# Altium PCB backBreakoutPCB.PcbDoc
Units mil, origin at the board's own origin, x right, y up, seen from the top; angles counter-clockwise.
Board outline 2800 x 1650 mil, 2 copper layers (Top Layer, Bottom Layer); 38 components, 35 nets, 176 pads, 5 vias.
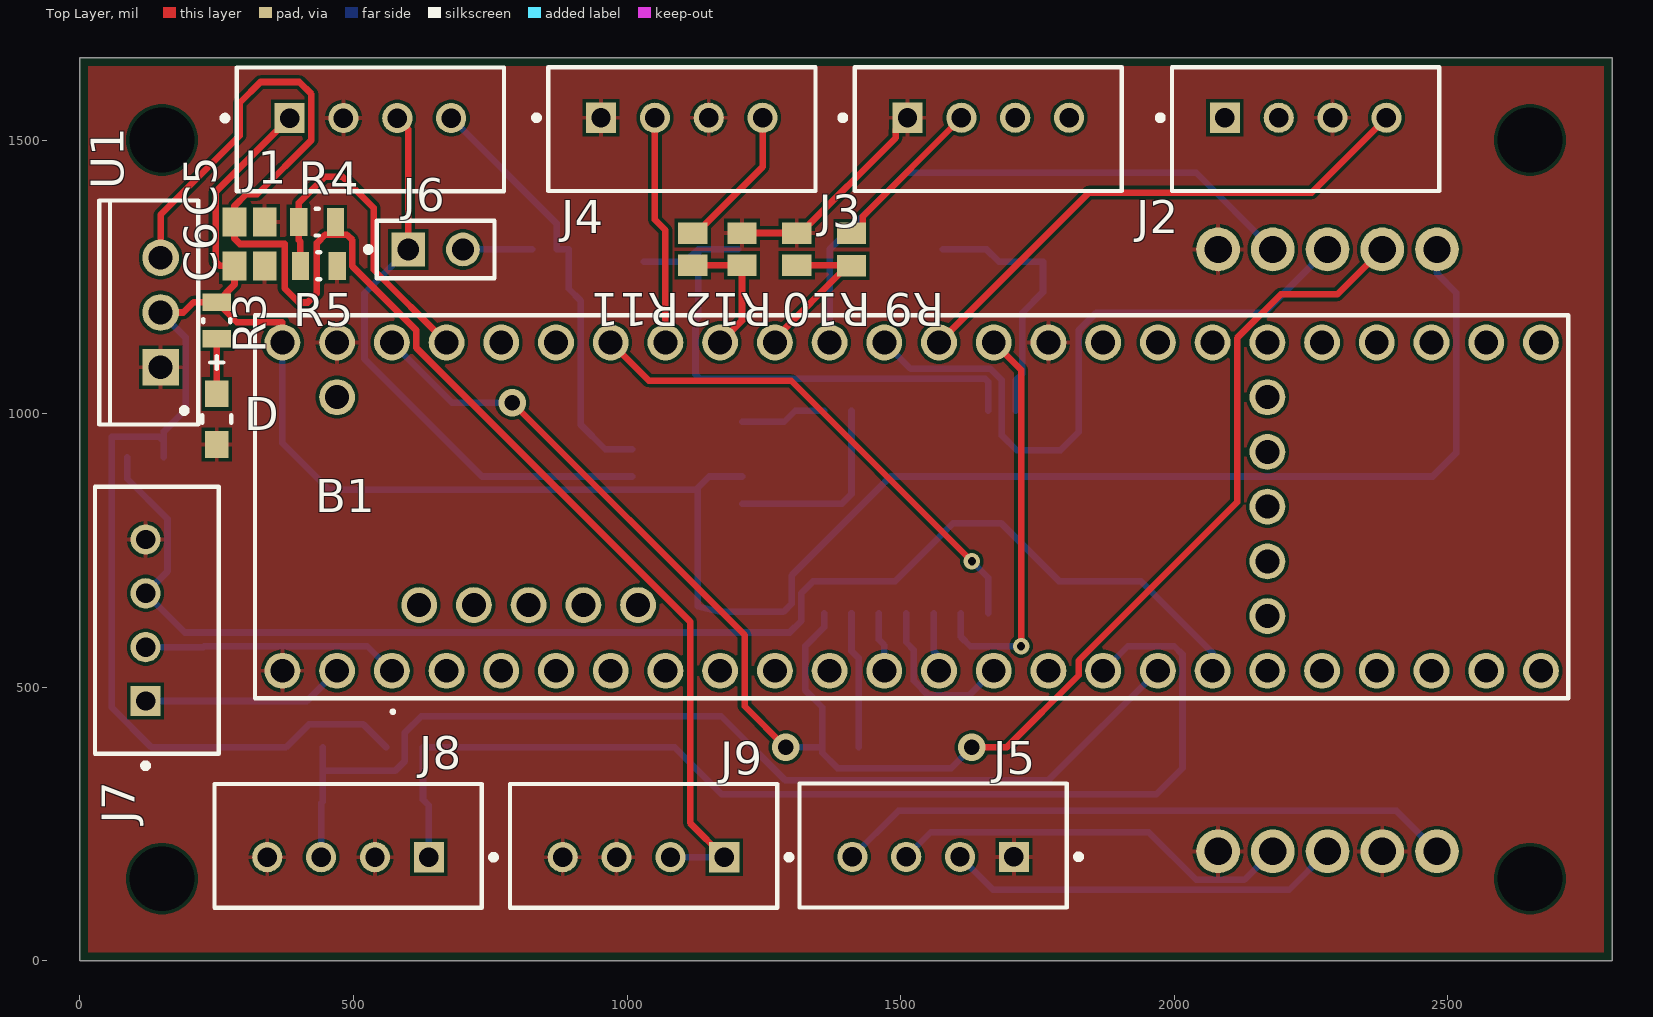
[diagram p0: Top Layer view]
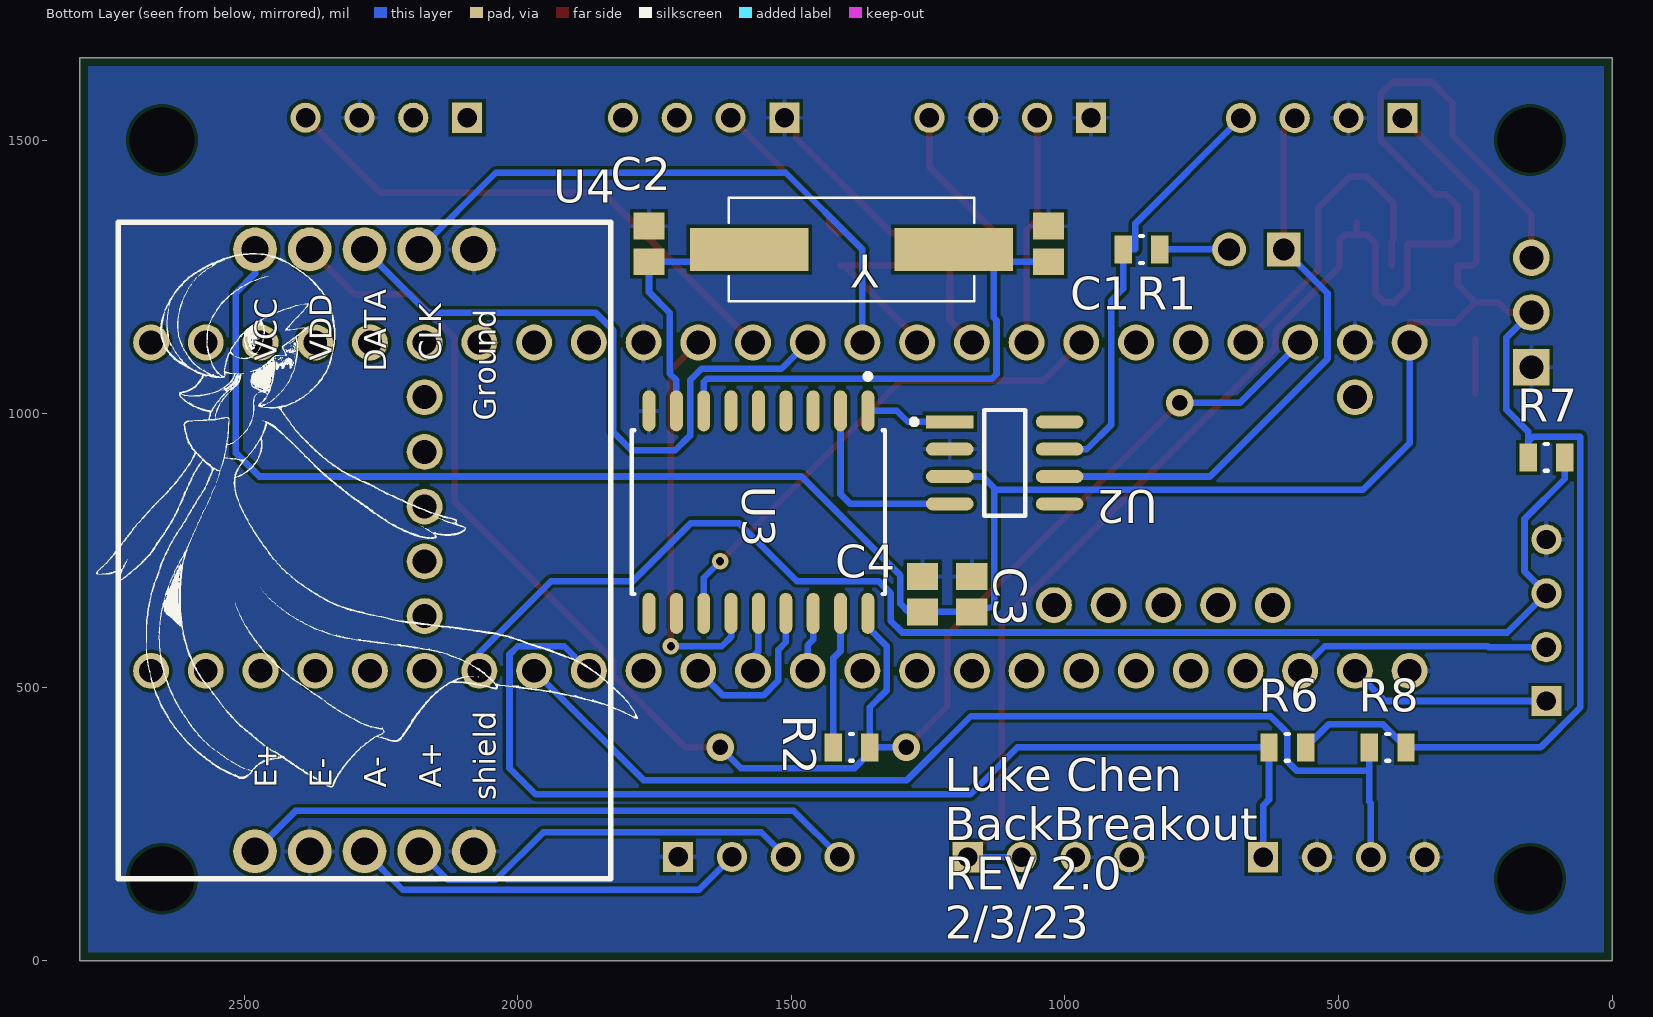
[diagram p1: Bottom Layer view, seen from below]
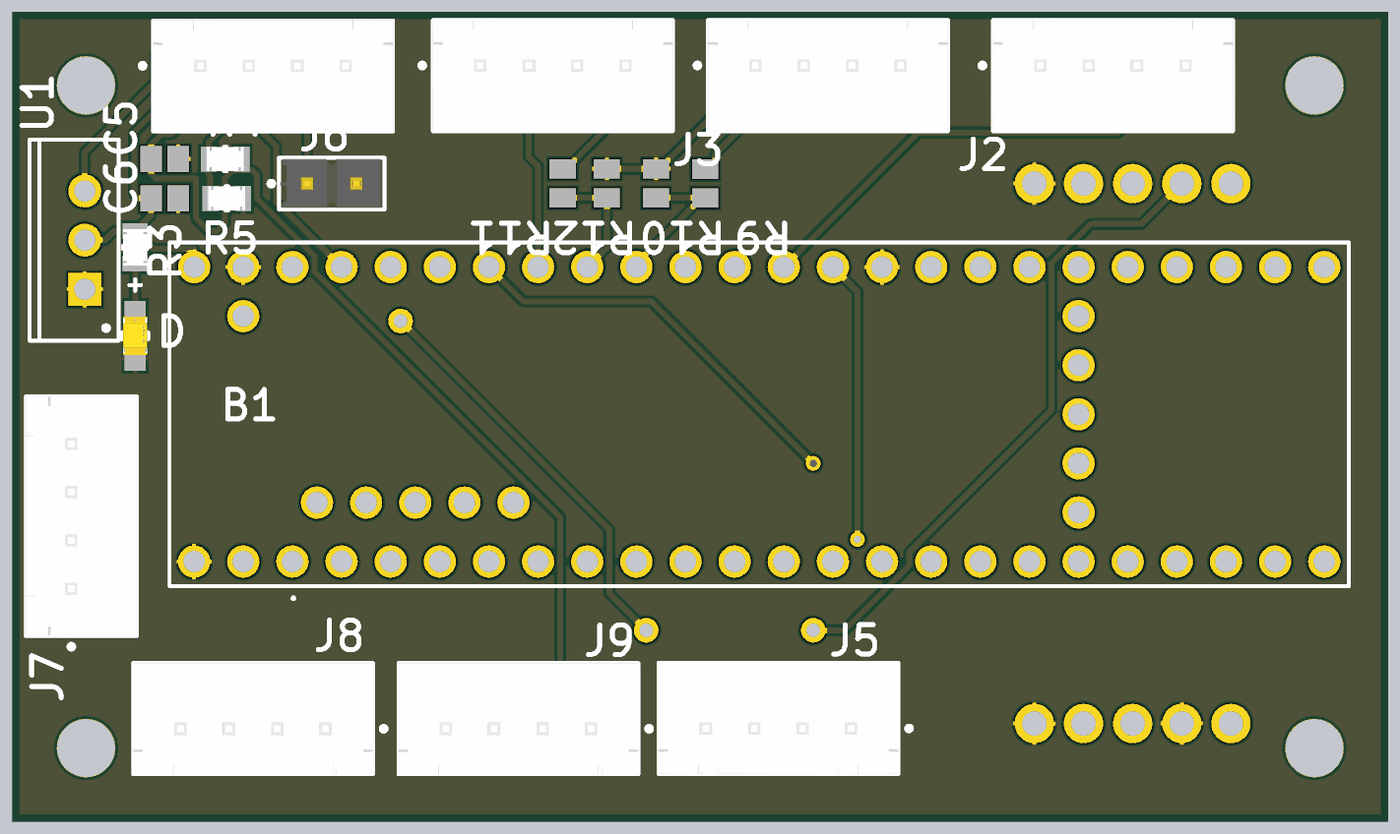
[diagram p2: 3D render of the assembled board from above, using the file's embedded part models]
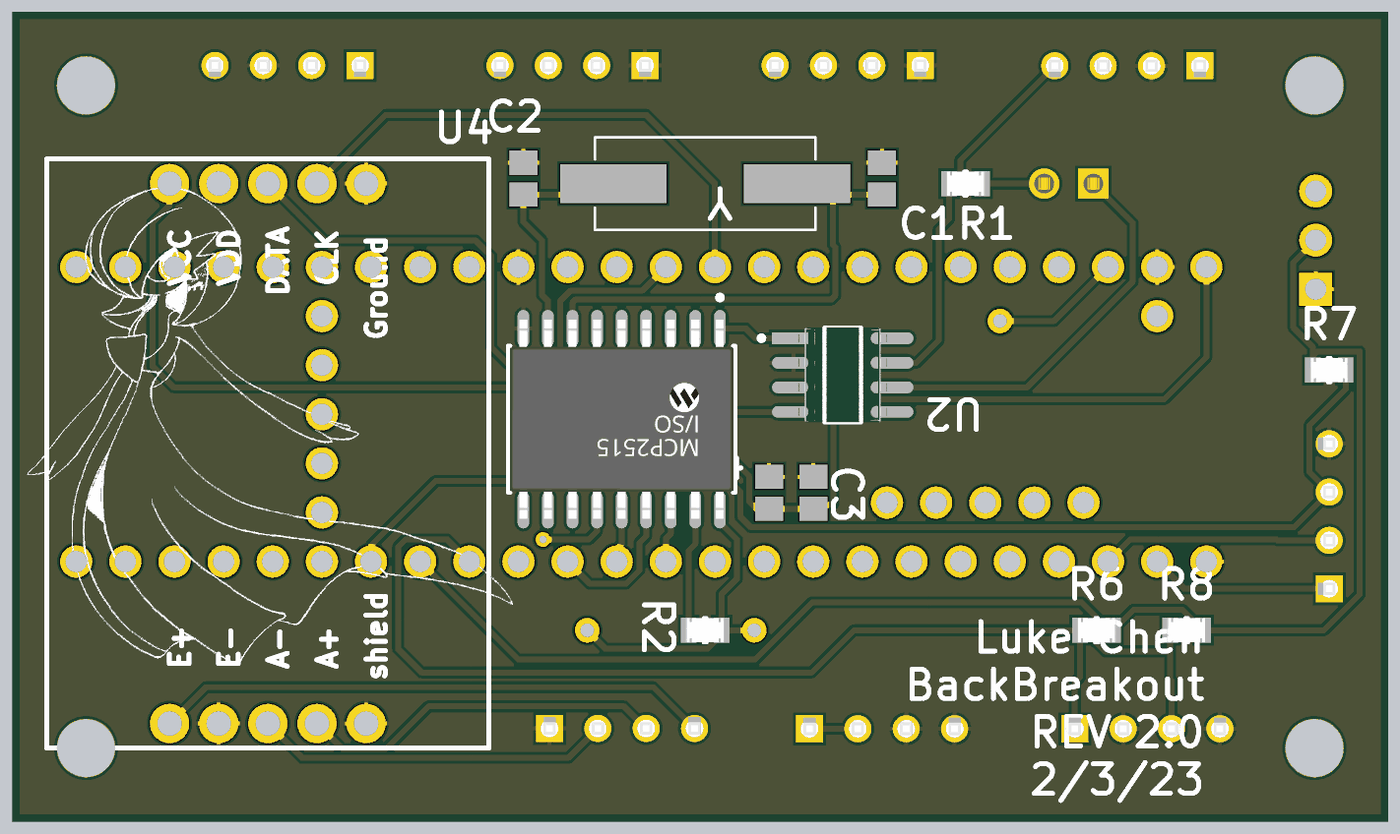
[diagram p3: 3D render of the assembled board from below, using the file's embedded part models]

## Layer stack, top to bottom
Top Solder: solder mask 0.4, Solder Resist, Dk 3.5
Top Layer: signal copper 1.4
Dielectric 1: dielectric 12.6, FR-4, Dk 4.8
Bottom Layer: signal copper 1.4
Bottom Solder: solder mask 0.4, Solder Resist, Dk 3.5

## Board outline
0,0 0,1650 2800,1650 2800,0

## Design rules (kind name [scope] priority, off if disabled: settings)
BoardOutlineClearance [All] p1: gap=15 ignorepadtopadclearanceinfootprint=FALSE
Clearance [All] p1: gap=6 ignorepadtopadclearanceinfootprint=FALSE except(0: Arc-Hole Track-Hole SMDPad-Hole THPad-Hole Via-Hole Fill-Hole Poly-Hole Region-Hole Text-Hole)
ComponentClearance [All] p1: gap=1 collisioncheckmode=3 verticalgap=1 showdistances=FALSE
DiffPairsRouting [All] p1: maxlimit=393.7 minlimit=6 mostfreqgap=8 toplayer_minwidth=6 toplayer_maxwidth=15 toplayer_prefwidth=8 bottomlayer_minwidth=6 bottomlayer_maxwidth=15 bottomlayer_prefwidth=8 maxuncoupledlength=500
HoleSize [All] p1: absolutevalues=TRUE maxlimit=265 minlimit=13 maxpercent=80.000 minpercent=20.000
HoleToHoleClearance [All] p1: gap=10 allowstackedmicrovias=FALSE
MinimumAnnularRing [All] p1: minimumring=7
MinimumSolderMaskSliver [All] p1: minsoldermaskwidth=0
PlaneClearance [All] p1: clearance=10
PlaneConnect [All] p1: planeconnectstyle=Direct reliefexpansion=16 reliefentries=4 reliefconductorwidth=6 reliefairgap=6
PolygonConnect [All] p1: connectstyle=Relief reliefconductorwidth=8 reliefentries=4 polygonreliefangle="90 Angle" airgapwidth=6
RoutingCorners [All] p1: cornerstyle=45-Degree minsetback=49.21 maxsetback=49.21
RoutingVias [All] p1: holewidth=15 width=30 viastyle="Through Hole" minholewidth=13 minwidth=27 maxholewidth=100 maxwidth=114
SilkToSilkClearance [All] p1: silktosilkclearance=0
SilkToSolderMaskClearance [IsPad] p1: minsilkscreentomaskgap=6 clearancetoexposedcopper=TRUE
SolderMaskExpansion [All] p1: expansion=2.95 istentingtop=FALSE
Width Width_3 [InNet('5V')] p1: maxlimit=32 minlimit=10 preferedwidth=16 minimp=50.000000 maximp=50.000000 favimp=50.000000
Width Width_2 [InNet('3.3V')] p2: maxlimit=32 minlimit=10 preferedwidth=16 minimp=50.000000 maximp=50.000000 favimp=50.000000
Width Width_1 [All] p3: maxlimit=32 minlimit=10 preferedwidth=12 minimp=50.000000 maximp=50.000000 favimp=50.000000
Width [InNet('GND')] p4: maxlimit=400 minlimit=8 preferedwidth=16 minimp=50.000000 maximp=50.000000 favimp=50.000000
20 further rules are at their usual default settings.

## Classes and differential pairs
component class amp: R6 R7 R8 U4
component class RearBreakoutSchematic: B1 C5 C6 R4 R5 U1
component class connectors: J1 J2 J3 J4 J5 J7 J8 J9 R9 R10 R11 R12
component class CAN_module: C1 C2 C3 C4 D J6 R1 R2 R3 U2 U3 Y Y?

## Components (designator, comment, footprint, x,y, rotation, side; value= is the part's Value field where it differs from the comment)
B1 "TEENSY_4.1" TEENSY41 570,530 r0 top
C1 "22pf_MCP1" CAPC2013X145X50NL20T20 1030,1310 r90 bottom
C2 "22pf_MCP2" CAPC2013X145X50NL20T20 1760,1310 r90 bottom
C3 "10uf_MCP" CAPC2013X145X50NL20T20 1260,670 r270 bottom
C4 "0.1uf_MCP" CAPC2013X145X50NL20T20 1170,670 r270 bottom
C5 "1uF" CAPC2013X145X50LL20T25 310,1350 r180 top
C6 "1uF" CAPC2013X145X50LL20T25 310,1270 r180 top
D "APT2012MGC" FP-APT2012MGC-MFG 250,990 r270 top
J1 "B4B-XH-A(LF)(SN)" FP-B4B-XH-A_LF_SN-MFG 530.79,1519.33 r180 top
J2 "B4B-XH-A(LF)(SN)" FP-B4B-XH-A_LF_SN-MFG 2240,1520 r180 top
J3 "B4B-XH-A(LF)(SN)" FP-B4B-XH-A_LF_SN-MFG 1660,1520 r180 top
J4 "B4B-XH-A(LF)(SN)" FP-B4B-XH-A_LF_SN-MFG 1100,1520 r180 top
J5 "B4B-XH-A(LF)(SN)" FP-B4B-XH-A_LF_SN-MFG 1559.21,210.67 r0 top
J6 "TSW-102-07-L-S" FP-TSW-102-07-L-S-MFG 650,1300 r0 top
J7 "B4B-XH-A(LF)(SN)" FP-B4B-XH-A_LF_SN-MFG 140.67,622.36 r270 top
J8 "B4B-XH-A(LF)(SN)" FP-B4B-XH-A_LF_SN-MFG 490,210 r0 top
J9 "B4B-XH-A(LF)(SN)" FP-B4B-XH-A_LF_SN-MFG 1030,210 r0 top
R1 "120_MCP" FP-CRCW0805-e3-IPC_C 860,1300 r180 bottom
R2 "10k_MCP1" FP-CRCW0805-e3-IPC_C 1390,390 r180 bottom
R3 "10k_MCP2" FP-CRCW0805-e3-IPC_C 250,1170 r270 top
R4 "27k_BATT_SENS" FP-CRCW0805-e3-IPC_C 433.5,1350 r180 top
R5 "10k_BATT_SENS" FP-CRCW0805-e3-IPC_C 436.5,1270 r180 top
R6 "10k_THERM1_VD1" FP-CRCW0805-e3-IPC_C 593.5,390 r0 bottom
R7 "10k_THERM_SHAFT_VD1" FP-CRCW0805-e3-IPC_C 120,920 r180 bottom
R8 "10k_THERM2_VD1" FP-CRCW0805-e3-IPC_C 410,390 r0 bottom
R9 "10k_RBP_VD1" RESC2013X60X40LL20T25 1410,1300 r90 top
R10 "10k_RBP_VD1" RESC2013X60X40LL20T25 1310,1300.47 r270 top
R11 "10k_RBP_VD1" RESC2013X60X40LL20T25 1120,1300.47 r90 top
R12 "10k_RBP_VD1" RESC2013X60X40LL20T25 1210,1300.47 r270 top
U1 "LD1117V50" TO220 147.43,1184.79 r90 top
U2 "TJA1050T/CM,118" FP-SOT96-1-IPC_A 1110,910 r180 bottom
U3 "MCP2515-I/SO" FP-C04-051-MFG 1560,820 r270 bottom
U4 "hx711" PCBComponent_1 1830,150 r90 bottom
Y "ECS-80-20-5PXDU-TR" XTAL_ECS-80-20-5PXDU-TR 1390,1300 r180 bottom
? "Comment" "Screw M3" 150,150 r0 top
? "Comment" "Screw M3" 2650,150 r0 top
? "Comment" "Screw M3" 150,1500 r0 top
? "Comment" "Screw M3" 2650,1500 r0 top

## Footprints (in the part's own frame and the unit in brackets; to place one, negate y for a bottom-side part, rotate by r counter-clockwise, add the part's x,y. Pads: shape width x height; smd on the part's side, far side on the other; paste and mask are expansions set on the pad)
CAPC2013X145X50LL20T25 [mm] "Chip Capacitor, 2-Leads, Body 2.00x1.25mm, IPC High Density"
  rect 1.1x1.35 smd: 1(-0.7,0) 2(0.7,0)
  body extent -1.1,-0.72 1.1,0.72, height 1.45
CAPC2013X145X50NL20T20 [mm] "Chip Capacitor, 2-Leads, Body 2.00x1.25mm, IPC Medium Density"
  rect 1.25x1.45 smd: 1(-0.825,0) 2(0.825,0)
  body extent -1.1,-0.72 1.1,0.72, height 1.45
FP-APT2012MGC-MFG [mm]
  rect 1.25x1.1 smd paste+0 mask+0: 1(-1.175,0) 2(1.175,0)
  silkscreen extent -2.93,-0.67 0.18,0.67, body extent -1.9,-0.77 1.9,0.77, height 0.25
FP-B4B-XH-A_LF_SN-MFG [mm]
  rect 1.4x1.4 hole 0.9 paste-1000 mask+0: 1(3.75,-0.525)
  round 1.4 hole 0.9 paste-1000 mask+0: 2(1.25,-0.525) 3(-1.25,-0.525) 4(-3.75,-0.525)
  silkscreen extent -6.2,-2.88 6.87,2.87, body extent -6.3,-2.98 6.3,2.98, height 0.25
FP-C04-051-MFG [mm]
  rrect100% 1.9x0.6 smd paste+0 mask+0: 1(-4.7,5.08) 2(-4.7,3.81) 3(-4.7,2.54) 4(-4.7,1.27) 5(-4.7,0) 6(-4.7,-1.27) 7(-4.7,-2.54) 8(-4.7,-3.81) 9(-4.7,-5.08) 10(4.7,-5.08) 11(4.7,-3.81) 12(4.7,-2.54) 13(4.7,-1.27) 14(4.7,0) 15(4.7,1.27) 16(4.7,2.54) 17(4.7,3.81) 18(4.7,5.08)
  silkscreen extent -6.42,-5.88 3.8,5.88, body extent -5.15,-5.77 5.15,5.77, height 2.65
FP-CRCW0805-e3-IPC_C [mil]
  rect 31.75x51.5 smd paste+0 mask+0: 1(-33.5,0) 2(33.5,0)
  silkscreen extent -3,-25 3,25, body extent -39,-25 39,25, height 20
FP-SOT96-1-IPC_A [mil]
  rect 86.79x23.94 smd paste+0 mask+0: 1(-100.43,75)
  rrect100% 86.79x23.94 smd paste+0 mask+0: 2(-100.43,25) 3(-100.43,-25) 4(-100.43,-75) 5(100.43,-75) 6(100.43,-25) 7(100.43,25) 8(100.43,75)
  silkscreen extent -170,-96 37,96, body extent -118,-96 118,96, height 69
FP-TSW-102-07-L-S-MFG [mm]
  rect 1.57x1.57 hole 1.02 paste-1000 mask+0: 1(-1.27,0)
  round 1.57 hole 1.02 paste-1000 mask+0: 2(1.27,0)
  silkscreen extent -3.25,-1.34 2.73,1.34, body extent -2.67,-1.27 2.54,1.27, height 8.71
PCBComponent_1 [mil]
  round 80 hole 50 mask+2.5: 1(50,650) 2(50,550) 3(50,450) 4(50,350) 5(50,250) 6(1150,650) 7(1150,550) 8(1150,450) 9(1150,350) 10(1150,250)
  silkscreen extent 0,0 1200,900
RESC2013X60X40LL20T25 [mm] "Chip Resistor, 2-Leads, Body 2.00x1.25mm, IPC High Density"
  rect 1x1.35 smd: 1(-0.75,0) 2(0.75,0)
  body extent -1.1,-0.72 1.1,0.72, height 0.6
"Screw M3" [mm]
  round 0 hole 3: x(0,0)
TEENSY41 [mm]
  round 1.665 hole 1.11: 1(0,0) 2(2.54,0) 3(5.08,0) 4(7.62,0) 5(10.16,0) 6(12.7,0) 7(15.24,0) 8(17.78,0) 9(20.32,0) 10(22.86,0) 11(25.4,0) 12(27.94,0) 13(27.94,15.24) 14(25.4,15.24) 15(22.86,15.24) 16(20.32,15.24) 17(17.78,15.24) 18(15.24,15.24) 19(12.7,15.24) 20(10.16,15.24) 21(7.62,15.24) 22(5.08,15.24) 23(2.54,15.24) 24(33.02,0) 25(35.56,0) 26(38.1,0) 27(40.64,0) 28(43.18,0) 29(45.72,0) 30(48.26,0) 31(50.8,0) 32(53.34,0) 33(53.34,15.24) 34(50.8,15.24) 35(48.26,15.24) 36(45.72,15.24) 37(43.18,15.24) 38(40.64,15.24) 39(38.1,15.24) 40(35.56,15.24) 41(33.02,15.24) 42(30.48,0) 43(40.64,2.54) 44(40.64,5.08) 45(40.64,7.62) 46(40.64,10.16) 47(40.64,12.7) 48(11.43,3.05) 49(8.89,3.05) 50(6.35,3.05) 51(3.81,3.05) 52(1.27,3.05) 53(0,15.24) 55(-5.08,15.24) 57(-2.54,0) 68(-2.54,12.7) 69(30.48,15.24) 70(-2.54,15.24) 71(-5.08,0)
  silkscreen extent -6.35,-1.95 54.61,16.51
TO220 [mm] "TO, Thru-Hole, Vertical, Heatsink Mounted; 3 In-Line Leads; Pitch 2.54 mm"
  rect 1.7x1.7 hole 1.1: 1(-2.54,0)
  round 1.7 hole 1.1: 2(0,0) 3(2.54,0)
  silkscreen extent -5.2,-1.75 5.2,2.85, body extent -5.25,-1.8 5.25,2.9, height 19.7
XTAL_ECS-80-20-5PXDU-TR [mm]
  rect 5.5x2 smd: 1(-4.75,0) 2(4.75,0)
  silkscreen extent -5.7,-2.4 5.7,2.4

## Part data
B1: "Teensy 4.1 Development Board", Manufacturer_Name=PJRC, Manufacturer_Part_Number="TEENSY 4.1", Datasheet Link=https://www.pjrc.com/store/teensy41.html
C1 C2 C3 C4: library part CMP-1036-01227-2, Manufacturer=Vitramon, Part Number=VJ0805A220GXXCW1BC
C5 C6: library part CMP-1036-04746-2, "C0805C105K4PACTU", Manufacturer=Kemet, Part Number=C0805C105K4PACTU
D: library part CMP-44529-000017-1, "LED GREEN CLEAR CHIP SMD", Case Code (Imperial)=0805, Case Code (Metric)=2012, Color=Green, Forward Current=20mA, Forward Voltage=2.1V, Lens Color=Colorless, Max Operating Temperature=85°C, Min Operating Temperature=-40°C, Package Quantity=2000, Power Rating=75mW, Case/Package=0805, Dominant Wavelength=570nm, Height=0.75mm, Illumination Color=Green, Lead Free="Lead Free", Length=2mm, Lens Style=Clear, Lens Transparency=Clear, Luminous Intensity=70mcd, Mount="Surface Mount", Packaging="Tape and Reel", Test Current=20mA, Viewing Angle=120°, Width=1.25mm
J1 J2 J3 J4 J5 J7 J8 J9: library part CMP-17439-000250-1, "CONN HEADER VERT 4POS 2.5MM", Color=Natural, Contact Resistance=20mR, Current Rating=3A, Flammability Rating="UL94 V-0", Housing Color=White, Insulation Resistance=1GR, Max Operating Temperature=85°C, Max Voltage Rating (AC)=250V, Min Operating Temperature=-25°C, Package Quantity=500, Connector Type=Header, Contact Finish - Mating=TIN, Contact Material=Brass, Contact Plating=Tin, Contact Shape=Square, Contact Type="Male Pin", Depth=5.75mm, Fastening Type=Detent, Gender=Male, Housing Material=Polyamide, Insulation Color=Natural, Insulation Material=Nylon, Lead Free="Lead Free", Lead Pitch=2.5mm, Length=12.4mm, Mated Stacking Heights=9.8mm, Material=Polyamide, Max Current Rating=3A, Max Voltage Rating (DC)=250V, Mount="Through Hole", Number of Contacts=4, Number of Positions=4, Number of Rows=1, Orientation=Straight, Packaging=Bulk, Pitch=2.5mm, REACH SVHC="No SVHC", Series=XH, Termination=Solder, Voltage Rating=250V, Voltage Rating (AC)=250V, Wire/Cable Gauge=22AWG
J6: library part CMP-02766-001428-1, "CONN HEADER VERT 2POS 2.54MM", Color=Black, Current Rating=7.6A, Max Operating Temperature=125°C, Max Voltage Rating (AC)=550V, Min Operating Temperature=-55°C, Package Quantity=1, Connector Type="Male Pin", Contact Material=Bronze, Contact Mating Length=0.23inch, Contact Plating=Gold, Contact Type="Male Pin", Depth=2.54mm, Gender=Male, Housing Color=Black, Housing Material=Polyester, Lead Free="Lead Free", Length=5.08mm, Max Current Rating=7.6A, Mount="Through Hole", Number of Contacts=2, Number of Positions=2, Number of Rows=1, Orientation=Straight, Packaging=Bulk, Pitch=2.54mm, Radiation Hardening=No, REACH SVHC="No SVHC", RoHS Compliant=Yes, Series=TSW, Termination=Solder, Voltage Rating=550V, Width=2.54mm
R1 R2 R3 R4 R5 R6 R7 R8: library part CMP-02407-009256-1, "RES Thick Film, 4.02Ω, 1%, 0.125W, 200ppm/°C, 0805", Case Code (Imperial)=0805, Case Code (Metric)=2012, Max Operating Temperature=155°C, Max Power Dissipation=125mW, Min Operating Temperature=-55°C, Package Quantity=5000, Resistance=4.02R, Temperature Coefficient=200ppm/°C, Tolerance=1%, Voltage Rating=150V, Case/Package=0805, Composition="Thick Film", Contact Plating=Tin, Features="Automotive AEC-Q200", Height=0.02inch, Lead Free="Lead Free", Length=0.079inch, Number of Terminations=2, Packaging="Tape and Reel", Power Rating=125mW, Radiation Hardening=No, Voltage Rating (DC)=150V, Weight=0.000194oz, Width=0.049inch
R9 R10 R11 R12: library part CMP-2001-00877-1, Manufacturer=Panasonic, Part Number=ERA6AEB7870V
U1: library part CMP-0244-00472-1, "Fixed Low Drop Positive Voltage Regulator, 5V, 3-Pin TO-220", ComponentLink1Description="Manufacturer URL", ComponentLink1URL=http://www.st.com, ComponentLink2Description=Datasheet, ComponentLink2URL=http://www.st.com/internet/com/TECHNICAL_RESOURCES/TECHNICAL_LITERATURE/DATASHEET/CD00000544.pdf, ComponentLink3Description="Package Specification", ComponentLink3URL=http://www.st.com/internet/com/TECHNICAL_RESOURCES/TECHNICAL_LITERATURE/PACKAGE_INFORMATION/CD00004649.pdf, DatasheetVersion=1/11/2011, PackageDescription="TO, Thru-Hole, Vertical, Heatsink Mounted; 3 In-Line Leads; Pitch 2.54 mm", PackageReference=TO220, PackageVersion=ver3.0
U2: library part CMP-2000-04923-2, "IC TRANSCEIVER HALF 1/1 8SO", Case/Package=SO, Max Operating Temperature=150°C, Max Supply Current=10mA, Max Supply Voltage=5.25V, Min Operating Temperature=-40°C, Min Supply Voltage=4.75V, Package Quantity=2500, Contact Plating=Gold, Data Rate=1Mbps, Interface=CAN, Lead Free="Lead Free", Mount="Surface Mount", Nominal Supply Current=10mA, Number of Pins=8, Number of Receive Buffers=1, Number of Transceivers=1, Number of Transmit Buffers=1, Packaging="Tape and Reel", Radiation Hardening=No, REACH SVHC="No SVHC", Receiver Hysteresis=70mV, Simplex/Duplex="Half Duplex"
U3: library part CMP-0186-00133-3, "IC CAN CONTROLLER W/SPI 18SOIC", Ambient Temperature Range High=+125°C, Ambient Temperature Range Low=-65°C, Manufacturer=Microchip, Max Supply Voltage=5.5V, Min Supply Voltage=2.7V, Nominal Supply Current=10mA, Package=C04-051, Temperature="-40°C to +85°C", Temperature Range High=+85°C, Temperature Range Low=-40°C, Automotive=No, Category=IC, ComponentLink2Description=Datasheet, ComponentLink2URL=http://ww1.microchip.com/downloads/en/DeviceDoc/MCP2515-Stand-Alone-CAN-Controller-with-SPI-20001801J.pdf, Device Class L1="Integrated Circuits (ICs)", Device Class L2="Interface ICs", Device Class L3=Controllers, Digikey Description="IC CAN CONTROLLER W/SPI 18SOIC", Footprint Url=http://ww1.microchip.com/downloads/en/DeviceDoc/18L_SOIC_Wide_7.50_SO_C04-0051D.pdf, Function=Controller, Height=2.65mm, Interface=SPI,CAN, Ipc Land Pattern Name=SOIC127P1030X265-18, Lead Free=Yes, Manufacturer Part Number=MCP2515-I/SO, Mouser Description="CAN Interface IC W/ SPI Interface", Octopart=https://octopart.com/mcp2515-i%2Fso-microchip-430187, RoHS=TRUE, Standoff Height=0.1mm
U4: library part Component_1
Y: "8MHz Â±30ppm Crystal 20pF 60 Ohms HC-49/US", Package="HC49/US ECS International", Availability=Unavailable, MF="ECS Inc.", MP=ECS-80-20-5PXDU-TR, Price=None, SnapEDA_Link=https://www.snapeda.com/parts/ECS-80-20-5PXDU-TR/ECS%20Inc./view-part/584052/?ref=snap

## Via types
v1: diameter 50, hole 28, Top Layer to Bottom Layer, 3 vias
v2: diameter 30, hole 15, Top Layer to Bottom Layer, 2 vias

## Nets (pads, with @x,y where several pads share a name; then routed paths per layer and width w, separated by ;. In a path a pad name is that pad's centre, name@x,y a point inside that pad or via, vN(x,y) a via of type N, cw(c..) or ccw(c..) an arc to the next point about the centre after c; other vN are vias at no path point)
3.3V: B1.53 R2.2 U3.18 U4.7 | length 3070.3
  Top Layer w12: v1(790,1020) 1214.78,595.22 1214.78,465.22 v1(1290,390) ; v1(1630,390) 1693.32,390 1825.22,521.9 1825.22,548.55 2114.78,838.1 2114.78,1138.1 2194.45,1217.77 2297.77,1217.77 U4.7
  Bottom Layer w12: B1.53 680,1020 v1(790,1020) ; v1(1290,390) R2.2 ; U3.18 1360,609.37 1325.22,574.59 1325.22,494.79 1356.5,463.51 R2.2 ; v1(1630,390) 1592.25,352.25 1384.38,352.25 1356.5,380.12 R2.2
+5: B1.55 C3.2 C4.2 C6.2 J1.1 R3.1 R6.1 R7.1 R8.1 U1.2 U2.3 U4.6 | length 5388.2
  Top Layer w12: U1.2 189,1184.79 207.71,1203.5 R3.1 ; B1.55 370,1167 286.5,1167 R3.1 ; J1.1 248,1404.85 248,1278 256,1270 C6.2 282.44,1235.94 R3.1
  Bottom Layer w12: U1.2 193,1139.21 193,1007 153.5,967.5 153.5,948.5 ; R7.1 153.5,948.5 ; B1.55 370,946 455,861 1129,861 ; R6.1 518,432 418.5,432 R8.1 131,390 58,463 58,958 144,958 153.5,948.5 ; U2.3 1150,885 1129,864 1129,861 ; U4.6 2480,1256 2515,1221 2515,928 2472,885 1481.55,885 1300.55,704 1300.55,652.55 1285.52,637.52 C3.2 C4.2 1129,648 1129,861
GND: B1.69 B1.70 B1.71 C1.2 C2.2 C3.1 C4.1 C5.1 C6.1 D.2 J1.2 J2.3 J3.1 J4.1 J4.3 J5.1 J7.4 J8.2 J8.4 J9.3 J9.4 R5.1 R10.1 R12.1 U1.1 U2.2 U3.9 U4.2 U4.5 U4.10 | length 398.5
  Top Layer w12: R12.1 R10.1 1316.89,1330 1490.8,1503.91 1490.8,1519.11 J3.1
NetB1_1: B1.1 J7.2 | length 469.4
  Bottom Layer w12: J7.2 225,573.15 226.85,575 525,575 B1.1
NetB1_10: B1.10 U3.16 | length 109.1
  Bottom Layer w12: U3.16 1460,587 1470,577 B1.10
NetB1_11: B1.11 U3.14 | length 109.1
  Bottom Layer w12: U3.14 1560,566 1570,556 B1.11
NetB1_12: B1.12 U3.15 | length 304.6
  Bottom Layer w12: U3.15 1510,582 1524,568 1524,512 1551,485 1625,485 B1.12
NetB1_13: B1.13 U3.13 | length 735.7
  Top Layer w12: B1.13 1720,1080 v2(1720,575)
  Bottom Layer w12: U3.13 1610,592 1627,575 v2(1720,575)
NetB1_14: B1.14 J2.4 | length 987.7
  Top Layer w12: B1.14 1844,1404 2250.97,1404 J2.4
NetB1_15: B1.15 U4.8 | length 1211.7
  Bottom Layer w12: B1.15 1518,1082 1664,1082 1685,1061 1685,960 1712,933 1792,933 1825,966 1825,1152 1857,1184 2164,1184 U4.8
NetB1_16: B1.16 U4.9 | length 1096
  Bottom Layer w12: B1.16 1370,1300 1510,1440 2040,1440 U4.9
NetB1_19: B1.19 J4.2 | length 418.6
  Top Layer w12: J4.2 1050.79,1354.21 1070,1335 B1.19
NetB1_20: B1.20 U3.12 | length 933.2
  Top Layer w12: B1.20 1040,1060 1300,1060 v2(1630,730)
  Bottom Layer w12: v2(1630,730) 1660,700 U3.12
NetB1_23: B1.23 R4.2 R5.2 | length 597.8
  Top Layer w12: R5.2 403,1313.65 400,1316.66 R4.2 400,1385 448,1433 480,1433 537,1376 537,1263 B1.23
NetB1_24: B1.24 J8.1 R6.2 | length 2026.4
  Bottom Layer w12: J8.1 637.64,284 627,294.64 R6.2 1087,390 1173,304 1967,304 2015,352 2015,560 2000,575 1915,575 B1.24
NetB1_25: B1.25 J8.3 R8.2 | length 1932.3
  Bottom Layer w12: J8.3 440.79,288 443.5,290.71 443.5,349.5 ; R8.2 443.5,349.5 ; B1.25 1770.25,330.25 1288.75,330.25 1172,447 624,447 594,417 594,365 576,347 446,347 443.5,349.5
NetB1_26: B1.26 J7.3 R7.2 | length 2518.6
  Bottom Layer w12: R7.2 86.5,881 160,807.5 160,711.57 J7.3 191.57,600 1297,600 1318.55,621.55 1318.55,672 1340.55,694 1490.12,694 1596.12,800 1683.26,800 1789.26,694 1938.83,694 2070,562.83 B1.26
NetB1_57: B1.57 J7.1 | length 372.9
  Bottom Layer w12: J7.1 414.72,474.72 B1.57
NetC1_1: C1.1 U3.7 Y.2 | length 1005.4
  Bottom Layer w12: C1.1 1105,1277.52 Y.2@1130,1300 ; Y.2 Y.2@1130,1300 ; U3.7 1660,1058 1654.39,1063.61 1133.39,1063.61 1125,1072 1125,1170 1130,1175 Y.2@1130,1300
NetC2_1: C2.1 U3.8 Y.1 | length 485.5
  Bottom Layer w12: Y.1 1657,1300 1679.48,1277.52 C2.1 1760,1222 1722,1184 1722,1073 1710,1061 U3.8
NetC5_2: C5.2 J9.1 J9.2 R4.1 U1.3 | length 2784.4
  Top Layer w12: U1.3 147.43,1363.43 292,1508 292,1568 330,1606 401,1606 423,1584 423,1500 324,1401 304,1401 282.44,1379.44 C5.2 282.44,1320 292.44,1310 374,1310 374,1229 400,1203 416,1203 433,1220 433,1312 448,1327 R4.1@467,1327 ; R4.1 R4.1@467,1327 ; J9.1 1115,251.97 1115,620 615,1120 615,1152 498,1269 498,1317 488,1327 R4.1@467,1327
  Bottom Layer w12: J9.2 J9.1
NetD_1: D.1 R3.2 | length 100.2
  Top Layer w12: D.1 R3.2
NetJ1_3: J1.3 J6.1 U2.6 | length 1060
  Top Layer w12: J1.3 600,1520 J6.1
  Bottom Layer w12: J6.1 520,1220 520,1100 735,885 U2.6
NetJ1_4: J1.4 R1.1 U2.7 | length 784.4
  Bottom Layer w12: J1.4 871,1347.42 871,1300 R1.1 893.5,1228 915,1206.5 915,980 960,935 U2.7
NetJ5_2: J5.2 U4.3 | length 725.4
  Bottom Layer w12: J5.2 1668.43,130 2210,130 U4.3
NetJ5_3: J5.3 U4.4 | length 746.2
  Bottom Layer w12: J5.3 1555,235 1953,235 2040,148 2128,148 U4.4
NetJ5_4: J5.4 U4.1 | length 1133.9
  Bottom Layer w12: J5.4 1495.58,274 2406,274 U4.1
NetJ6_2: J6.2 R1.2 | length 126.5
  Bottom Layer w12: J6.2 R1.2
NetR2_1: R2.1 U3.17 | length 250.6
  Bottom Layer w12: U3.17 1410,566 1423.5,552.5 R2.1
NetU2_1: U2.1 U3.1 | length 157.9
  Bottom Layer w12: U2.1 1287.24,985 1307.28,1005.04 U3.1
NetU2_4: U2.4 U3.2 | length 359.1
  Bottom Layer w12: U2.4 1392,835 1410,853 U3.2
Pot1_in: J3.2 R9.2 | length 298.3
  Top Layer w12: R9.2 1416.89,1329.53 1430.57,1343.21 1430.57,1360.46 J3.2
Pot2_in: J4.4 R11.2 | length 267.6
  Top Layer w12: R11.2 1126.89,1330 1247.64,1450.75 J4.4
REAR_POT1: B1.17 R9.1 R10.2 | length 302.7
  Top Layer w12: B1.17 1270,1137.36 1403.11,1270.47 R9.1 1409.53,1270.94 R10.2
REAR_POT2: B1.18 R11.1 R12.2 | length 247.5
  Top Layer w12: R11.1 R12.2 1210,1170 B1.18
pads on no net: ?.x B1.2 B1.3 B1.4 B1.5 B1.6 B1.7 B1.8 B1.9 B1.21 B1.22 B1.27 B1.28 B1.29 B1.30 B1.31 B1.32 B1.33 B1.34 B1.35 B1.36 B1.37 B1.38 B1.39 B1.40 B1.41 B1.42 B1.43 B1.44 B1.45 B1.46 B1.47 B1.48 B1.49 B1.50 B1.51 B1.52 B1.68 J2.1 J2.2 J3.3 J3.4 U2.5 U2.8 U3.3 U3.4 U3.5 U3.6 U3.10 U3.11

## Polygon pours and split planes (outlines as drawn)
GND on Top Layer "GND_L01_P000" (solid, pour order 0): 0,1640 2800,1640 2800,0 0,0
GND on Bottom Layer "GND_L02_P002" (solid, pour order 2): 0,1780 2850,1780 2850,0 0,0

## Silkscreen, mask and mechanical layers (free items; w line width, h text height)
Bottom Overlay:
  drawing of 38 lines, arcs and shapes, not listed
  text "Luke Chen / BackBreakout / REV 2.0 / 2/3/23" at 1219.73,40 h60
Mechanical 13:
  lines w10: 0,0 2800,0 2800,1630 0,1630 0,0

## Text inside footprints (layer, text, board x,y; h text height)
U4: Bottom Overlay "shield" at 2039.99,293.36 h40 r270; Bottom Overlay "A+" at 2139.99,316.67 h40 r270; Bottom Overlay "A-" at 2239.99,316.67 h40 r270; Bottom Overlay "E-" at 2339.99,316.67 h40 r270; Bottom Overlay "E+" at 2439.99,316.67 h40 r270; Bottom Overlay "VCC" at 2439.99,1096.67 h40 r270; Bottom Overlay "VDD" at 2339.99,1096.67 h40 r270; Bottom Overlay "DATA" at 2239.99,1076.68 h40 r270; Bottom Overlay "CLK" at 2139.99,1096.67 h40 r270; Bottom Overlay "Ground" at 2039.99,986.69 h40 r270